# Allegro board WR5045D_Ver2.1.brd
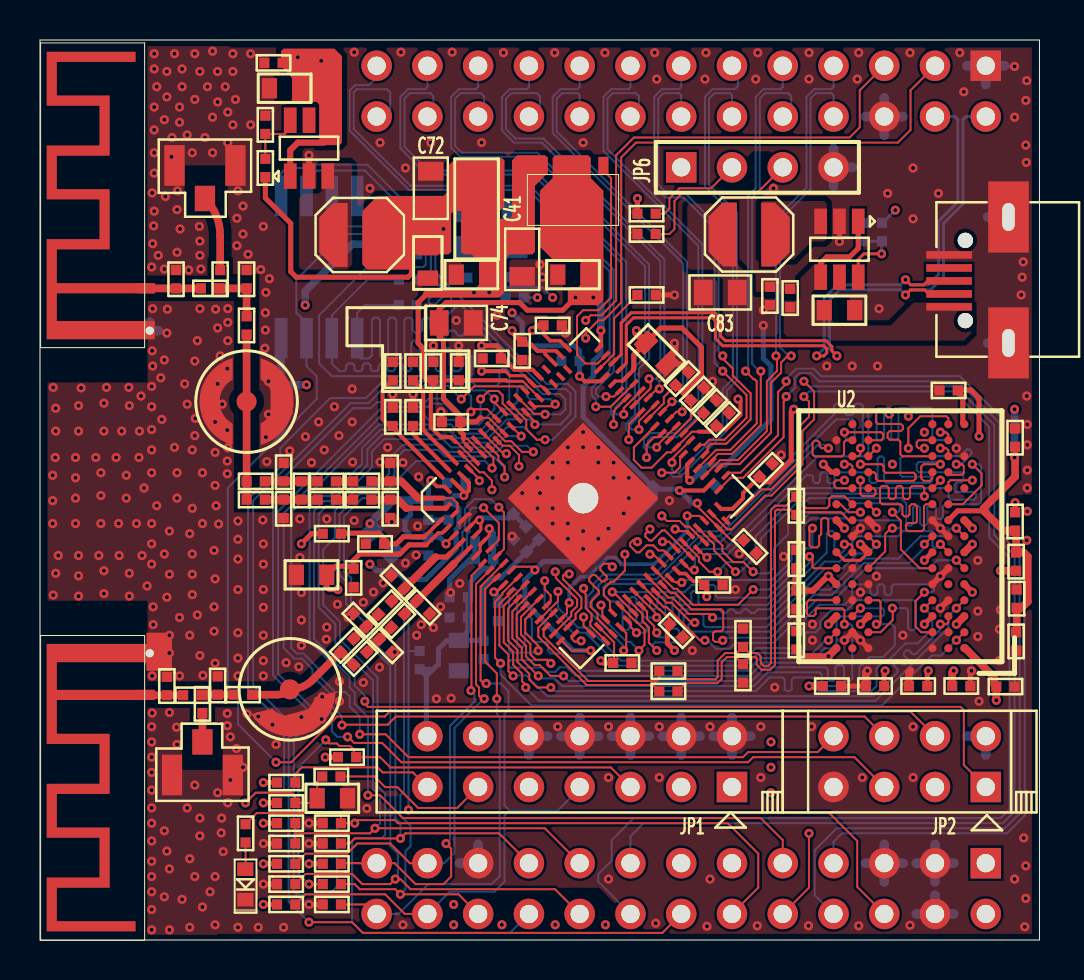
[diagram p0: board, top side]
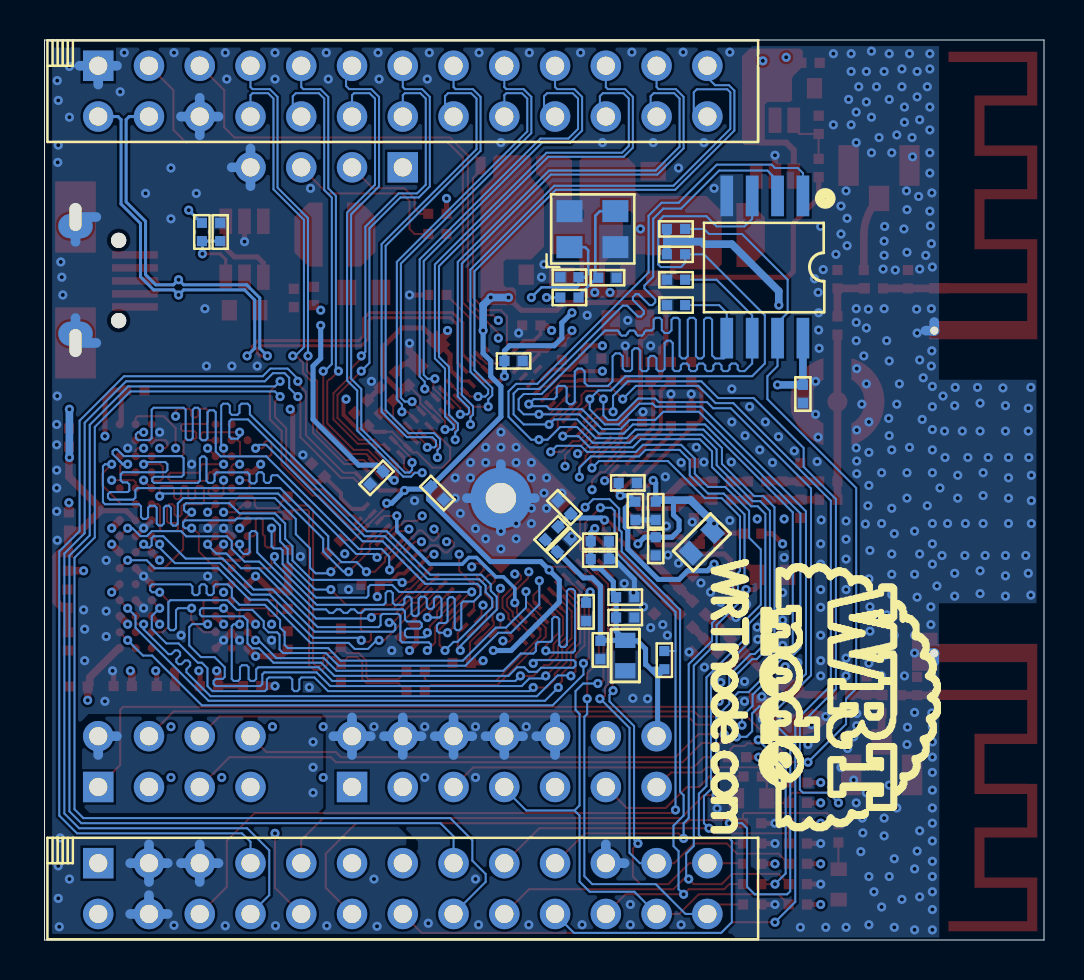
[diagram p1: board, bottom side, seen from below]

Outline 50.01 x 45.01 mm; copper layers: TOP, GND02, POWER03, BOTTOM. Coordinates in mm from the lower left corner of the outline.
Outline path: 0,45.01 0,0 50.01,0 50.01,45.01 0,45.01

## Design rules (mm)
net group DIFFPAIR2: nets RXIN0 RXIP0
net group DIFFPAIR3: nets TXON0 TXOP0
net group DIFFPAIR4: nets RXIN4 RXIP4
net group DIFFPAIR5: nets TXON4 TXOP4
net group DIFFPAIR6: nets USB_DN USB_DP
net group DIFFPAIR7: nets RXIN1 RXIP1
net group DIFFPAIR8: nets TXON1 TXOP1
net group DIFFPAIR9: nets RXIN2 RXIP2
net group DIFFPAIR10: nets TXON2 TXOP2
net group DIFFPAIR11: nets RXIN3 RXIP3
net group DIFFPAIR12: nets TXON3 TXOP3
net group DIFFPAIR13: nets MCLK_N MCLK_P
net group DIFFPAIR14: nets NETR30_2 NETR31_2
net group DDR_A: nets MA00 MA01 MA02 MA03 MA04 MA05 MA06 MA07 MA08 MA09 MA10 MA11 MA12 MBA0 MBA1 MCASN MCKE MCSN MODT MRASN MWEN
net group DDRDQ0: nets MDQ00 MDQ01 MDQ02 MDQ03 MDQ04 MDQ05 MDQ06 MDQ07 MDQM0 MDQS0
net group DDRDQ1: nets MDQ08 MDQ09 MDQ10 MDQ11 MDQ12 MDQ13 MDQ14 MDQ15 MDQM1 MDQS1
net group SPI: nets SPI_CLK SPI_CS0 SPI_MISO SPI_MOSI SPI_WP

## Placement (name value [footprint] x y rotation side)
C1  VAL*  [R0603]  17.12 19.89 45 bottom
C2  -  [R0402]  19.43 19.68 0 bottom
C3  -  [R0402]  19.43 21.46 180 bottom
C4  -  [R0402]  16.76 19.81 270 top
C5  -  [R0402]  17.65 28.45 180 top
C6  -  [R0402]  17.53 21.56 0 top
C7  -  [R0402]  12.19 21.56 180 top
C8  -  [R0402]  20.45 21.46 180 bottom
C9  -  [R0402]  14.35 22.02 90 top
C10  -  [R0402]  10.34 30.73 180 top
C11  -  [R0402]  13.08 22.48 180 top
C12  -  [R0402]  10.34 33.05 180 top
C13  -  [R0402]  6.81 33.05 180 top
C14  -  [R0402]  14.35 22.94 90 top
C15  -  [R0402]  17.53 23.39 0 top
C16  -  [R0402]  18.67 26.16 180 top
C17  -  [R0402]  12.19 23.39 180 top
C18  -  [R0402]  15.7 18.11 180 top
C19  VAL*  [R0603]  13.59 18.26 90 top
C20  -  [R0402]  20.83 22.86 270 bottom
C21  -  [R0402]  18.67 28.45 180 top
C22  -  [R0402]  17.91 17.91 225 top
C23  -  [R0402]  16 16 45 top
C25  -  [R0402]  10.16 12.27 270 top
C27  -  [R0402]  8.89 12.73 180 top
C28  -  [R0402]  6.35 12.7 180 top
C30  -  [R0402]  19.18 16.64 225 top
C31  -  [R0402]  24 21.64 315 bottom
C32  -  [R0402]  17.3 14.71 45 top
C33  -  [R0402]  23.75 33.15 90 bottom
C34  -  [R0402]  21.84 33.12 270 bottom
C35  -  [R0402]  22.23 19.94 270 bottom
C36  VAL*  [R0603]  20.95 14.22 0 bottom
C37  -  [R0402]  22.23 19.05 270 bottom
C38  -  [R0402]  20.95 17.14 270 bottom
C39  -  [R0402]  20.95 16.13 270 bottom
C40  -  [R0402]  19.68 28.45 0 top
C41  -  [R0805]  24.13 34.04 270 top
C42  -  [R0402]  43.94 12.7 90 top
C43  -  [R0402]  46.1 12.7 270 top
C44  -  [R0402]  41.78 12.7 90 top
C45  -  [R0402]  32.89 27.3 135 top
C46  -  [R0402]  48.87 17.07 0 top
C47  -  [R0402]  48.84 18.92 0 top
C48  -  [R0402]  20.95 28.45 180 top
C49  -  [R0402]  39.62 12.7 270 top
C50  -  [R0402]  37.85 19.05 0 top
C51  -  [R0402]  37.85 17.02 180 top
C52  -  [R0402]  37.85 14.99 0 top
C53  -  [R0402]  33.69 17.76 270 top
C54  -  [R0402]  29.14 13.86 270 top
C55  -  [R0402]  22.91 16.41 0 bottom
C56  -  [R0402]  48.31 12.67 270 top
C57  VAL*  [R0603]  26.67 33.27 270 top
C59  -  [R0402]  48.79 25.12 0 top
C63  VAL*  [R0603]  14.63 7.09 90 top
C64  -  [R0402]  12.06 27.3 180 bottom
C65  -  [R0402]  34.16 26.04 135 top
C66  -  [R0402]  31.83 15.47 45 top
C67  -  [R0402]  32.13 28.07 135 top
C68  VAL*  [R0603]  12.24 42.6 90 top
C69  -  [R0402]  11.68 43.87 270 top
C70  -  [R0402]  24.13 29.46 0 top
C72  -  [R0805]  19.56 37.59 90 top
C73  VAL*  [R0603]  19.41 33.86 0 top
C74  -  [R0805]  20.83 30.86 0 top
C75  -  [R0402]  20.57 25.91 90 top
C76  -  [R0402]  26.54 28.96 90 bottom
C78  -  [R0402]  36.32 23.5 135 top
C80  VAL*  [R0603]  30.86 29.34 225 top
C81  -  [R0402]  35.53 19.67 45 top
C82  -  [R0402]  30.35 22.35 135 bottom
C83  -  [R0805]  34.04 32.38 180 top
C84  -  [R0402]  36.53 32.21 180 top
C85  -  [R0402]  22.61 29.08 270 top
C86  -  [R0402]  22.2 14.5 180 bottom
C87  -  [R0402]  24.03 19.74 45 bottom
C88  -  [R0402]  33.4 23.11 225 bottom
C89  -  [R0402]  25.65 30.73 90 top
C90  VAL*  [R0603]  40.01 31.5 270 top
C91  -  [R0402]  37.54 32.11 180 top
C92  VAL*  [R0603]  21.59 33.27 90 top
C94  -  [R0402]  45.47 27.48 270 top
C95  -  [R0402]  35.18 13.34 180 top
C96  -  [R0402]  35.18 15.11 0 top
D1  LED  [D0603]  10.27 2.78 270 top
E1  Val*  [WLAN-TI-ANT-A]  3.45 37.24 90 top
E2  Val*  [WLAN-TI-ANT-B]  3.45 7.61 90 top
E3  Value*  [SMA_ANT_2]  8.26 37.08 270 top
E4  Value*  [SMA_ANT_2]  8.13 9.91 90 top
JP1  -  [IDC2X7_2_54_M]  27.01 8.92 90 top
JP2  -  [IDC2X4_2_54_M]  43.52 8.92 90 top
JP3  Val*  [IDC-13X2-2_54_M]  33.36 2.57 270 bottom
JP4  Val*  [IDC-13X2-2_54_M]  33.36 42.45 270 bottom
JP5  Value  [MICRO_USB_HOLE]  45.49 31.66 270 top
JP6  -  [SIP4]  32.09 38.64 90 top
L1  -  [R0402]  14.61 20.32 270 top
L2  -  [R0402]  16.13 22.02 270 top
L3  -  [R0402]  10.79 22.02 270 top
L4  -  [R0402]  8.51 32.59 270 top
L5  -  [R0402]  16.13 22.94 270 top
L6  -  [R0402]  10.79 22.94 270 top
L7  -  [R0402]  17.27 16.61 315 top
L8  -  [R0402]  15.37 14.73 315 top
L9  -  [R0402]  7.62 12.24 270 top
L10  -  [R0402]  17.91 15.97 315 top
L11  -  [R0402]  16.03 14.07 315 top
L12  -  [R0402]  24.64 20.35 225 bottom
L13  Value*  [L_3X3]  16 35.26 0 top
L14  Value*  [L_3X3]  35.48 35.28 180 top
NOREF  -  []  11.48 13.84 270 bottom
R1  -  [R0402]  17.65 26.16 0 top
R2  -  [R0402]  23.75 32.13 270 bottom
R3  -  [R0402]  37.85 21.72 180 top
R4  -  [R0402]  48.79 20.93 180 top
R5  -  [R0402]  48.84 14.94 180 top
R6  -  [R0402]  30.35 35.31 90 top
R7  -  [R0402]  14.61 1.78 90 top
R8  -  [R0402]  30.35 32.26 270 top
R9  -  [R0402]  12.32 3.81 90 top
R10  -  [R0402]  12.32 6.86 90 top
R11  -  [R0402]  15.37 9.14 90 top
R12  -  [R0402]  12.32 1.78 90 top
R13  -  [R0402]  18.41 35.56 90 bottom
R14  -  [R0402]  33.53 26.67 135 top
R15  -  [R0402]  11.28 38.61 180 top
R16  VAL*  [R1206]  21.84 36.58 0 top
R17  -  [R0402]  11.28 40.77 180 top
R18  -  [R0402]  14.61 3.81 90 top
R19  -  [R0402]  14.61 2.79 270 top
R20  -  [R0402]  41.22 35.41 0 bottom
R21  -  [R0402]  42.14 35.41 180 bottom
R22  -  [R0402]  19 14 180 bottom
R23  -  [R0402]  12.32 2.79 270 top
R24  -  [R0402]  14.61 4.83 270 top
R25  -  [R0402]  18.41 34.29 270 bottom
R26  -  [R0402]  14.61 5.84 270 top
R27  -  [R0402]  18.41 31.75 270 bottom
R28  -  [R0402]  18.41 33.02 270 bottom
R29  -  [R0402]  30.35 36.32 270 top
R30  -  [R0402]  31.45 13.45 270 top
R31  -  [R0402]  31.45 12.43 270 top
R32  -  [R0402]  12.32 4.83 270 top
R33  -  [R0402]  14.58 8.18 90 top
R34  -  [R0402]  12.32 7.87 90 top
R35  -  [R0402]  9.02 33.05 180 top
R36  -  [R0402]  8.13 11.81 0 top
R37  -  [R0402]  12.32 5.84 270 top
R38  -  [R0402]  10.29 5.33 180 top
T1  -  [T_3_5]  10.34 26.92 270 top
T2  -  [T_3_5]  12.51 12.54 195 top
U1  Value*  [QFN-148-RT]  27.18 22.1 45 top
U2  -  [FPBGA-84N]  43.05 20.19 180 top
U3  VAL*  [SO-8W]  13.97 33.66 90 bottom
U4  -  [SOT23-6L]  13.46 39.6 90 top
U5  -  [SOT23-6L]  40.01 34.54 270 top
U6  Value*  [SOT-89]  26.67 36.2 180 top
Y1  VAL*  [SMD3225B]  23.75 36.45 180 bottom

## Library data of the parts
C1 C19 C36 C57 C63 C68 C73 C80 C90 C92 = R0603
C2-C18 C20-C23 C25 C27 C28 C30-C35 C37-C40 C42-C56 C59 C64-C67 C69 C70 C75 C76 C78 C81 C82 C84-C89 C91 C94-C96 L1-L12 R1-R15 R17-R38 = R0402
C41 C72 C74 C83 = R0805
D1 = D0603
E1 = WLAN-TI-ANT-A
E2 = WLAN-TI-ANT-B
E3 E4 = SMA_ANT_2
JP1 = IDC2X7_2_54_M
JP2 = IDC2X4_2_54_M
JP3 JP4 = IDC-13X2-2_54_M
JP5 = MICRO_USB_HOLE
JP6 = SIP4
L13 L14 = L_3X3
R16 = R1206
T1 T2 = T_3_5
U1 = QFN-148-RT
U2 = FPBGA-84N
U3 = SO-8W
U4 U5 = SOT23-6L
U6 = SOT-89
Y1 = SMD3225B

## Footprints (pads in the part's own frame, mm; a bottom-side part is the same pattern mirrored in y, then rotated)
D0603
  rect 0.686x0.813 smd: 1(-0.762,0) 2(0.762,0)
FPBGA-84N
  round 0.406 smd: A1(-3.2,5.601) A2(-2.4,5.601) A3(-1.6,5.601) A7(1.6,5.601) A8(2.4,5.601) A9(3.2,5.601) B1(-3.2,4.801) B2(-2.4,4.801) B3(-1.6,4.801) B7(1.6,4.801) B8(2.4,4.801) B9(3.2,4.801) C1(-3.2,4) C2(-2.4,4) C3(-1.6,4) C7(1.6,4) C8(2.4,4) C9(3.2,4) D1(-3.2,3.2) D2(-2.4,3.2) D3(-1.6,3.2) D7(1.6,3.2) D8(2.4,3.2) D9(3.2,3.2) E1(-3.2,2.4) E2(-2.4,2.4) E3(-1.6,2.4) E7(1.6,2.4) E8(2.4,2.4) E9(3.2,2.4) F1(-3.2,1.6) F2(-2.4,1.6) F3(-1.6,1.6) F7(1.6,1.6) F8(2.4,1.6) F9(3.2,1.6) G1(-3.2,0.8) G2(-2.4,0.8) G3(-1.6,0.8) G7(1.6,0.8) G8(2.4,0.8) G9(3.2,0.8) H1(-3.2,0) H2(-2.4,0) H3(-1.6,0) H7(1.6,0) H8(2.4,0) H9(3.2,0) J1(-3.2,-0.8) J2(-2.4,-0.8) J3(-1.6,-0.8) J7(1.6,-0.8) J8(2.4,-0.8) J9(3.2,-0.8) K2(-2.4,-1.6) K3(-1.6,-1.6) K7(1.6,-1.6) K8(2.4,-1.6) K9(3.2,-1.6) L1(-3.2,-2.4) L2(-2.4,-2.4) L3(-1.6,-2.4) L7(1.6,-2.4) L8(2.4,-2.4) M2(-2.4,-3.2) M3(-1.6,-3.2) M7(1.6,-3.2) M8(2.4,-3.2) M9(3.2,-3.2) N1(-3.2,-4) N2(-2.4,-4) N3(-1.6,-4) N7(1.6,-4) N8(2.4,-4) P2(-2.4,-4.801) P3(-1.6,-4.801) P7(1.6,-4.801) P8(2.4,-4.801) P9(3.2,-4.801) R1(-3.2,-5.601) R2(-2.4,-5.601) R3(-1.6,-5.601) R7(1.6,-5.601) R8(2.4,-5.601)
IDC2X4_2_54_M
  rect 1.524x1.524 hole 0.914: 1(-1.27,-3.81)
  round 1.524 hole 0.914: 2(1.27,-3.81) 3(-1.27,-1.27) 4(1.27,-1.27) 5(-1.27,1.27) 6(1.27,1.27) 7(-1.27,3.81) 8(1.27,3.81)
IDC2X7_2_54_M
  rect 1.524x1.524 hole 0.914: 1(-1.27,-7.62)
  round 1.524 hole 0.914: 2(1.27,-7.62) 3(-1.27,-5.08) 4(1.27,-5.08) 5(-1.27,-2.54) 6(1.27,-2.54) 7(-1.27,0) 8(1.27,0) 9(-1.27,2.54) 10(1.27,2.54) 11(-1.27,5.08) 12(1.27,5.08) 13(-1.27,7.62) 14(1.27,7.62)
IDC-13X2-2_54_M
  rect 1.524x1.524 hole 0.914: 1(-1.27,-13.97)
  round 1.524 hole 0.914: 2(1.27,-13.97) 3(-1.27,-11.43) 4(1.27,-11.43) 5(-1.27,-8.89) 6(1.27,-8.89) 7(-1.27,-6.35) 8(1.27,-6.35) 9(-1.27,-3.81) 10(1.27,-3.81) 11(-1.27,-1.27) 12(1.27,-1.27) 13(-1.27,1.27) 14(1.27,1.27) 15(-1.27,3.81) 16(1.27,3.81) 17(-1.27,6.35) 18(1.27,6.35) 19(-1.27,8.89) 20(1.27,8.89) 21(-1.27,11.43) 22(1.27,11.43) 23(-1.27,13.97) 24(1.27,13.97) 25(-1.27,16.51) 26(1.27,16.51)
L_3X3
  custom 1.422x3.2 smd: 1(-1.321,0) 2(1.321,0)
MICRO_USB_HOLE
  round 0.762 hole 0.762 unplated: (-3.327,0.813) (0.686,0.813)
  rect 0.381x2.286 smd: 1(0,0) 2(-0.65,0) 3(-1.3,0) 4(-1.95,0) 5(-2.6,0)
  rect 3.556x2.032 hole 1.397x0.61: 8(-4.496,2.972) 9(1.803,2.972)
QFN-148-RT
  rect 0.513x0.194 smd: 1(-5.8,4.25) 2(-5.8,3.75) 3(-5.8,3.25) 4(-5.8,2.75) 5(-5.8,2.25) 6(-5.8,1.75) 7(-5.8,1.25) 8(-5.8,0.75) 9(-5.8,0.25) 10(-5.8,-0.25) 11(-5.8,-0.75) 12(-5.8,-1.25) 13(-5.8,-1.75) 14(-5.8,-2.25) 15(-5.8,-2.75) 16(-5.8,-3.25) 17(-5.8,-3.75) 18(-5.8,-4.25) 37(5.8,-4.25) 38(5.8,-3.75) 39(5.8,-3.25) 40(5.8,-2.75) 41(5.8,-2.25) 42(5.8,-1.75) 43(5.8,-1.25) 44(5.8,-0.75) 45(5.8,-0.25) 46(5.8,0.25) 47(5.8,0.75) 48(5.8,1.25) 49(5.8,1.75) 50(5.8,2.25) 51(5.8,2.75) 52(5.8,3.25) 53(5.8,3.75) 54(5.8,4.25) 55(5.8,4.75) 75(-5.15,4.5) 76(-5.15,4) 77(-5.15,3.5) 78(-5.15,3) 79(-5.15,2.5) 80(-5.15,2) 81(-5.15,1.5) 82(-5.15,1) 83(-5.15,0.5) 84(-5.15,0) 85(-5.15,-0.5) 86(-5.15,-1) 87(-5.15,-1.5) 88(-5.15,-2) 89(-5.15,-2.5) 90(-5.15,-3) 91(-5.15,-3.5) 92(-5.15,-4) 93(-5.15,-4.5) 113(5.15,-4.5) 114(5.15,-4) 115(5.15,-3.5) 116(5.15,-3) 117(5.15,-2.5) 118(5.15,-2) 119(5.15,-1.5) 120(5.15,-1) 121(5.15,-0.5) 122(5.15,0) 123(5.15,0.5) 124(5.15,1) 125(5.15,1.5) 126(5.15,2) 127(5.15,2.5) 128(5.15,3) 129(5.15,3.5) 130(5.15,4)
  rect 0.194x0.513 smd: 19(-4.25,-5.8) 20(-3.75,-5.8) 21(-3.25,-5.8) 22(-2.75,-5.8) 23(-2.25,-5.8) 24(-1.75,-5.8) 25(-1.25,-5.8) 26(-0.75,-5.8) 27(-0.25,-5.8) 28(0.25,-5.8) 29(0.75,-5.8) 30(1.25,-5.8) 31(1.75,-5.8) 32(2.25,-5.8) 33(2.75,-5.8) 34(3.25,-5.8) 35(3.75,-5.8) 36(4.25,-5.8) 56(4.75,5.8) 57(4.25,5.8) 58(3.75,5.8) 59(3.25,5.8) 60(2.75,5.8) 61(2.25,5.8) 62(1.75,5.8) 63(1.25,5.8) 64(0.75,5.8) 65(0.25,5.8) 66(-0.25,5.8) 67(-0.75,5.8) 68(-1.25,5.8) 69(-1.75,5.8) 70(-2.25,5.8) 71(-2.75,5.8) 72(-3.25,5.8) 73(-3.75,5.8) 74(-4.25,5.8) 94(-4.5,-5.15) 95(-4,-5.15) 96(-3.5,-5.15) 97(-3,-5.15) 98(-2.5,-5.15) 99(-2,-5.15) 100(-1.5,-5.15) 101(-1,-5.15) 102(-0.5,-5.15) 103(0,-5.15) 104(0.5,-5.15) 105(1,-5.15) 106(1.5,-5.15) 107(2,-5.15) 108(2.5,-5.15) 109(3,-5.15) 110(3.5,-5.15) 111(4,-5.15) 112(4.5,-5.15) 131(4,5.15) 132(3.5,5.15) 133(3,5.15) 134(2.5,5.15) 135(2,5.15) 136(1.5,5.15) 137(1,5.15) 138(0.5,5.15) 139(0,5.15) 140(-0.5,5.15) 141(-1,5.15) 142(-1.5,5.15) 143(-2,5.15) 144(-2.5,5.15) 145(-3,5.15) 146(-3.5,5.15) 147(-4,5.15) 148(-4.5,5.15)
  rect 5.334x5.334 hole 1.524: 149(0,0)
R0402
  rect 0.508x0.508 smd: 1(0,0.457) 2(0,-0.457)
R0603
  rect 1.016x0.762 smd: 1(0,0.76) 2(0,-0.76)
R0805
  rect 0.94x1.27 smd: 1(-0.851,0) 2(0.851,0)
R1206
  rect 1.524x1.6 smd: 1(0,1.397) 2(0,-1.397)
SIP4
  rect 1.524x1.524 hole 0.914: 1(0,0)
  round 1.524 hole 0.914: 2(0,-2.54) 3(0,-5.08) 4(0,-7.62)
SMA_ANT_2
  rect 1.27x1.016 smd: 1(0,0)
  rect 2.032x1.016 smd: 2(-1.651,-1.524) 3(-1.651,1.524)
SMD3225B
  rect 1.3x1.1 smd: 1(0,-1.8) 2(2.3,-1.8) 3(2.3,0) 4(0,0)
SO-8W
  rect 2.032x0.635 smd: 1(3.556,-1.905) 2(3.556,-0.635) 3(3.556,0.635) 4(3.556,1.905) 5(-3.556,1.905) 6(-3.556,0.635) 7(-3.556,-0.635) 8(-3.556,-1.905)
SOT23-6L
  rect 1.27x0.635 smd: 1(-1.397,0.94) 2(-1.397,0) 3(-1.397,-0.94) 4(1.397,-0.94) 5(1.397,0) 6(1.397,0.94)
SOT-89
  rect 0.508x0.889 smd: 1(-1.524,-2.527) 2(0,-2.527) 3(1.524,-2.527)
  oval 1.778x3.81 smd: 4(0,0)
T_3_5
  round 1 smd: 1(0,0)
  rect 1.3x1.1 smd: 2(0,1.75)
WLAN-TI-ANT-A
  rect 0.508x0.889 smd: 1(-4.648,-1.854)
  round 0.508 hole 0.406: 2(-6.769,-2.045)
WLAN-TI-ANT-B
  rect 0.508x0.889 smd: 1(4.648,-1.854)
  round 0.508 hole 0.406: 2(6.731,-2.045)

## Nets
3.3VD: C8.1 C18.2 C19.2 C20.2 C35.2 C36.2 C37.2 C38.2 C39.2 C64.1 C65.1 C68.2 C69.1 C70.1 C76.1 C78.1 C83.1 C84.1 C85.1 C86.1 C87.1 C88.1 C89.1 JP1.14 JP2.2 JP3.1 JP3.2 JP6.1 L1.2 L12.2 L14.2 R9.1 R10.1 R11.1 R12.1 R13.1 R18.1 R21.1 R22.2 R25.2 R29.2 R34.1 R37.2 U1.2 U1.6 U1.56 U1.57 U1.58 U1.60 U1.61 U1.80 U1.112 U1.117 U1.119 U1.122 U1.129 U1.134 U1.146 U1.147 U3.8 U4.1 U4.4
5.0VD: C90.2 C91.1 JP5.1 U5.1 U5.4
GND: C1.1 C2.1 C3.2 C4.2 C5.2 C6.2 C7.1 C8.2 C12.2 C13.2 C15.1 C16.2 C17.2 C18.1 C19.1 C20.1 C21.2 C22.2 C23.1 C27.2 C28.2 C30.1 C31.2 C32.2 C33.1 C34.1 C35.1 C36.1 C37.1 C38.1 C39.1 C40.1 C41.2 C42.1 C43.1 C44.1 C45.2 C46.1 C48.2 C49.1 C50.1 C51.1 C52.1 C53.1 C54.1 C55.1 C56.1 C57.2 C59.1 C63.2 C64.2 C65.2 C66.2 C67.2 C68.1 C69.2 C70.2 C72.2 C73.2 C74.2 C75.1 C76.2 C78.2 C80.1 C81.2 C82.2 C83.2 C84.2 C85.2 C86.2 C87.2 C88.2 C89.2 C90.1 C91.2 C92.1 C94.2 C95.1 C96.1 D1.2 E1.2 E2.2 E3.2 E3.3 E4.2 E4.3 JP1.2 JP1.4 JP1.6 JP1.8 JP1.10 JP2.7 JP3.3 JP3.4 JP3.5 JP3.21 JP4.1 JP4.6 JP5.5 JP5.8 JP5.9 JP6.4 R1.1 R5.1 R6.1 R7.1 R8.1 R14.2 R17.2 R20.2 R23.2 R24.2 R26.2 R27.2 R28.2 R32.2 T1.2 T2.2 U1.77 U1.149 U2.A3 U2.A7 U2.B2 U2.B8 U2.D2 U2.D8 U2.E3 U2.E7 U2.F2 U2.F8 U2.H2 U2.H8 U2.J3 U2.J7 U2.N1 U2.P9 U3.4 U4.2 U5.2 Y1.2 Y1.4
ANT_TRN: JP3.18 R23.1 U1.142
ANT_TRNB: JP3.19 R24.1 U1.69
DDR_REF: C46.2 C47.1 C59.2 R4.1 R5.2 U1.91 U1.110 U2.J2
DDR_VDD: C42.2 C43.2 C44.2 C47.2 C49.2 C50.2 C51.2 C52.2 C53.2 C54.2 C55.2 C56.2 C72.1 C73.1 C94.1 L13.2 R4.2 R15.1 R16.1 U1.10 U1.29 U1.93 U1.95 U2.A1 U2.A9 U2.C1 U2.C3 U2.C7 U2.C9 U2.E1 U2.E9 U2.G1 U2.G3 U2.G7 U2.G9 U2.J1 U2.J9 U2.M9 U2.R1
DINT: JP1.13 R34.2
EXT_LDO_DIG: U1.54 U6.1
GPO0: JP3.17 R32.1 R37.1 U1.139
HD: JP2.4 R13.2 U3.7
I2C_SCLK: JP3.15 U1.111
I2C_SD: JP3.16 U1.36
JDO: JP1.5 R11.2 R19.2
LINK0: JP3.22 R19.1 U1.82
LINK1: JP1.3 JP3.23 R9.2 U1.8
LINK2: JP1.7 JP3.24 R12.2 U1.83
LINK3: JP1.9 JP3.25 R18.2 U1.7
LINK4: JP1.1 JP3.26 R7.2 U1.9
MA00: U1.20 U2.M8
MA01: U1.107 U2.M3
MA02: U1.96 U2.M7
MA03: U1.31 U2.N2
MA04: U1.21 U2.N8
MA05: U1.106 U2.N3
MA06: U1.97 U2.N7
MA07: U1.30 U2.P2
MA08: U1.22 U2.P8
MA09: U1.104 U2.P3
MA10: U1.32 U2.M2
MA11: U1.98 U2.P7
MA12: U1.105 U2.R2
MBA0: U1.33 U2.L2
MBA1: U1.108 U2.L3
MCASN: U1.19 U2.L7
MCKE: U1.34 U2.K2
MCLK_N: C96.2 R3.2 R30.1 U2.K8
MCLK_P: C95.2 R3.1 R31.1 U2.J8
MCSN: U1.94 U2.L8
MDQ00: U1.24 U2.G8
MDQ01: U1.26 U2.G2
MDQ02: U1.99 U2.H7
MDQ03: U1.27 U2.H3
MDQ04: U1.102 U2.H1
MDQ05: U1.23 U2.H9
MDQ06: U1.101 U2.F1
MDQ07: U1.100 U2.F9
MDQ08: U1.88 U2.C8
MDQ09: U1.11 U2.C2
MDQ10: U1.87 U2.D7
MDQ11: U1.12 U2.D3
MDQ12: U1.86 U2.D1
MDQ13: U1.13 U2.D9
MDQ14: U1.85 U2.B1
MDQ15: U1.14 U2.B9
MDQM0: U1.28 U2.F3
MDQM1: U1.15 U2.B3
MDQS0: U1.103 U2.F7
MDQS1: U1.89 U2.B7
MODT: U1.17 U2.K9
MRASN: U1.92 U2.K7
MWEN: U1.109 U2.K3
NETC4_1: C4.1 L1.1 U1.1
NETC5_1: C5.1 R1.2 U1.74
NETC6_1: C6.1 L2.1 U1.75
NETC7_2: C7.2 C9.1 C11.1 L3.1
NETC9_2: C9.2 L2.2
NETC10_1: C10.1 L3.2 L6.2 T1.1
NETC10_2: C10.2 C12.1 L4.1 R35.1
NETC11_2: C11.2 C14.1 C17.1 L6.1
NETC13_1: C13.1 E1.1 L4.2
NETC14_2: C14.2 L5.2
NETC15_2: C15.2 L5.1 U1.76
NETC22_1: C22.1 L7.1 U1.4
NETC23_2: C23.2 L7.2 L8.1
NETC25_1: C25.1 L8.2 L11.2 T2.1
NETC25_2: C25.2 C27.1 L9.1 R36.1
NETC26_2: C32.1 L10.2 L11.1
NETC28_1: C28.1 E2.1 L9.2
NETC30_2: C30.2 L10.1 U1.5
NETC31_1: C31.1 L12.1 U1.78 U1.79
NETC33_2: C33.2 U1.145 Y1.1
NETC34_2: C34.2 R2.1 Y1.3
NETD1_2: D1.1 R38.1
NETE3_1: E3.1 R35.2
NETE4_1: E4.1 R36.2
NETJP1_11: JP1.11 R33.2
NETL13_1: L13.1 U4.3
NETL14_1: L14.1 U5.3
NETR2_2: R2.2 U1.71
NETR8_2: R8.2 U1.130
NETR14_1: R14.1 U1.43
NETR15_2: R15.2 R17.1 U4.6
NETR20_1: R20.1 R21.2 U5.6
NETR30_2: R30.2 U1.16
NETR31_2: R31.2 U1.90
PA_PE_G0: JP4.3 U1.141
PA_PE_G1: JP4.5 U1.68
PLL_VC_CAP: C16.1 U1.73
RSTN: C63.1 R10.2 R33.1 U1.66
RXD2: JP3.7 JP6.3 R6.2 U1.37
RXIN0: JP4.7 U1.115
RXIN1: JP4.11 U1.42
RXIN2: JP4.15 U1.121
RXIN3: JP4.19 U1.125
RXIN4: JP4.23 U1.126
RXIP0: JP4.8 U1.38
RXIP1: JP4.12 U1.118
RXIP2: JP4.16 U1.44
RXIP3: JP4.20 U1.48
RXIP4: JP4.24 U1.49
SOC_1.2VD: C45.1 C48.1 C57.1 C66.1 C67.1 C74.1 C75.2 C80.2 C81.1 C82.1 U1.18 U1.25 U1.35 U1.51 U1.55 U1.70 U1.84 U1.114 U1.120 U1.123 U1.128 U1.135 U1.140 U1.143 U6.2 U6.4
SOC_1.5VD: C1.2 C2.2 C3.1 C40.2 C41.1 C92.2 R16.2 U1.3 U1.144 U1.148 U6.3
SPI_CLK: JP2.6 JP3.13 R28.1 U1.136 U3.6
SPI_CS0: JP2.1 U1.64 U3.1
SPI_CS1: JP3.14 U1.62
SPI_HOLD: JP3.12 R26.1 R38.2 U1.138
SPI_MISO: JP2.3 JP3.9 U1.137 U3.2
SPI_MOSI: JP2.8 JP3.10 R27.1 U1.63 U3.5
SPI_WP: JP2.5 JP3.11 R25.1 U1.65 U3.3
TXD2: JP3.8 JP6.2 R29.1 U1.113
TXON0: JP4.9 U1.116
TXON1: JP4.13 U1.41
TXON2: JP4.17 U1.46
TXON3: JP4.21 U1.124
TXON4: JP4.26 U1.127
TXOP0: JP4.10 U1.39
TXOP1: JP4.14 U1.40
TXOP2: JP4.18 U1.45
TXOP3: JP4.22 U1.47
TXOP4: JP4.25 U1.50
USB_DN: JP4.2 JP5.2 U1.53
USB_DP: JP4.4 JP5.3 U1.52
WDT_RST_N: JP3.20 U1.67
WLED_N: JP3.6 R22.1 U1.81
XTAL_V12A: C21.1 U1.72

Pads without a net: JP1 12; JP5 4; U1 59 131 132 133; U2 A2 A8 E2 E8 L1 R3 R7 R8; U4 5; U5 5

## Via types
v1: diameter 0.457, hole 0.203, TOP to BOTTOM, 700 vias

## Routing (per net, layer and track width the routed paths; a pad name or vN(x,y) marks a point on that pad's centre or on a via; arc(x,y) is an arc through that point)
3.3VD: length 136.3
  TOP w0.102: 32.95,25.42 32.62,25.42 U1.119 31.59,24.38 31.37,24.38 30.61,23.62 30.1,23.62 29.72,24 29.72,24.64 U1.122 ; U1.61 24.77,27.69 25.13,27.69 U1.134
  TOP w0.152: U1.6 21.84,19.25 22.02,19.43 22.02,19.77 U1.80 22.48,20.23 v1(22.48,20.57) ; 23.29,28.45 23.52,28.22 24.24,28.22 U1.61
  TOP w0.178: 20.42,20.65 20.14,20.36 19.93,20.36 19.33,19.76 ; U1.56 26.02,29.97 25.53,29.97 25.2,30.3 C89.1 ; 25.73,28.85 25.27,29.31 25.27,29.46 25.82,29.46 U1.57
  TOP w0.203: U1.60 24.64,28.52 23.72,28.52 23.16,29.08 C85.1 ; C78.1 35.18,22.35 35.18,22.09 34.65,21.56 34.08,21.56 U1.112 ; v1(34.92,27.05) 35.05,26.92 35.05,26.26 34.33,25.54 34.02,25.54 33.85,25.71 C65.1 33.55,25.42 32.95,25.42 ; U1.146 21.46,22.86 21.46,22.48 v1(21.21,22.23) 21.21,22.41 U1.147 ; v1(32.51,22.99) 32.38,23.11 32.38,23.77 U1.117 ; C70.1 24.27,29.78 24.57,29.78 24.89,29.46 25.27,29.46 ; U1.129 28.07,27.94 27.25,27.94 v1(27,28.19) ; v1(22.1,28.45) 23.29,28.45
  TOP w0.254: C78.1 36.01,23.17 36.27,22.91 36.5,22.91 37.59,24 37.59,26.42 v1(37.72,26.54) ; C89.1 24.89,30.73 v1(24.64,30.48) ; v1(23.62,30.48) 23.62,30.4 24.13,29.9 C70.1 ; 19.33,19.76 18.47,19.76 18.01,19.3 16,19.3 15.7,19 C18.2 15.57,18.69 14.81,18.69 14.38,18.26 C19.2 14.35,18.26 14.35,17.65 14.48,17.53 v1(14.91,17.53) ; R29.2 v1(29.9,37.08) ; R37.2 v1(11.18,5.84) ; L1.2 13.59,20.32 v1(13.08,19.81) ; R10.1 v1(11.18,6.86) ; C85.1 23.06,29.51 22.86,29.72 v1(22.1,29.72) ; R34.1 v1(11.18,7.87) ; R9.1 v1(11.18,3.81) ; R18.1 v1(13.46,3.81) ; R12.1 v1(11.18,1.78) ; R11.1 v1(14.27,9.14)
  TOP w0.305: U4.1 12.52,39.5 12.9,39.88 14.22,39.88
  POWER03 w0.483: 19.39,9.25 JP1.14 ; JP1.14 19.39,11.13 ; JP1.14 18.45,10.19 ; JP1.14 20.33,10.19 ; 31.15,38.64 JP6.1 ; JP6.1 32.09,37.7 ; JP6.1 33.03,38.64 ; JP6.1 32.09,39.58 ; 47.33,9.25 JP2.2 ; JP2.2 47.33,11.13 ; JP2.2 48.27,10.19 ; JP2.2 46.39,10.19 ; JP3.2 47.33,2.24 ; JP3.2 48.27,1.3 ; JP3.2 46.39,1.3 ; JP3.1 48.27,3.84 ; JP3.1 47.33,2.9 ; JP3.1 46.39,3.84 ; JP3.1 47.33,4.78
  BOTTOM w0.152: v1(42.8,36.5) 42.16,35.86 R21.1
  BOTTOM w0.254: C20.2 21.29,22.3 v1(21.21,22.23) 20.75,22.23 C8.1 20.62,21.92 20.95,21.59 20.95,20.65 20.83,20.52 20.83,19.56 19.3,18.03 18.26,18.03 17.83,18.47 16.84,18.47 v1(16.51,18.8) ; C36.2 20.93,14.96 20.35,14.96 19.94,14.55 19.94,13.77 19.9,13.77 19.34,13.2 ; C36.2 22.18,14.98 C86.1 22.2,17.7 22.61,18.11 23.05,18.11 C87.1 L12.2 ; C36.2 21.41,15.44 C39.2 C38.2 21.55,17.28 21.55,17.92 22.17,18.54 22.18,18.54 22.23,18.59 22.53,18.59 22.68,18.75 C37.2 C35.2 22.68,20.37 v1(22.48,20.57) ; 19.34,13.2 19.34,10.24 JP1.14 ; 19.34,13.2 R22.2 19.53,13.54 19.34,13.34 19.34,13.36 ; v1(36.2,30.73) 36.2,29.08 36.58,28.7 36.58,26.04 34.29,23.75 33.39,23.75 C88.1 32.63,22.99 v1(32.51,22.99) ; v1(27,28.19) C76.1 27,29.46 26.75,29.72 24.51,29.72 24.13,30.1 24.13,30.86 v1(23.62,31.37)
  BOTTOM w0.381: 18.87,34.92 R13.1 ; 18.87,34.92 R25.2 ; 18.87,34.92 17.14,34.92 17.02,34.8 15.62,34.8 13.27,32.45 v1(13.27,31.75) ; v1(13.34,27.76) C64.1 12.06,30.1
  BOTTOM w0.483: 46.39,10.19 JP2.2 47.33,9.25
  vias: v1(12.9,44.15) v1(14.07,43.97) v1(36.2,31.5) v1(36.58,9.91) v1(36.58,8.64) v1(36.58,7.37)
5.0VD: length 4.2
  TOP w0.254: U5.1 40.94,34.59 40.51,34.16 39.37,34.16 39.07,33.86 U5.4
GND: length 80.5
  TOP w0.178: U1.77 21.42,21.29 21.52,21.29
  TOP w0.254: R8.1 v1(31.75,32.26) ; U2.H2 v1(45.05,20.59) U2.J3 ; U2.A7 v1(41.05,14.99) ; C45.2 R14.2 ; C75.1 20.12,26.37 v1(20.07,26.42) ; C49.1 C44.1 ; R23.2 v1(11.18,2.79) ; U5.2 v1(40.01,34.92) ; C67.2 32.05,28.8 C80.1 ; R32.2 v1(11.18,4.83) ; U2.B8 v1(40.25,14.99) ; U2.H8 v1(41.05,20.59) ; v1(46.61,13.46) 46.56,13.41 C43.1 ; R1.1 v1(17.65,27.3) ; C16.2 v1(18.67,27.3) ; R7.1 v1(13.46,1.78) ; R26.2 v1(13.46,5.84) ; C48.2 v1(20.95,29.72) ; R24.2 v1(13.46,4.83)
  TOP w0.305: U2.E3 v1(45.05,18.19) U2.F2 ; v1(41.05,14.99) U2.B8 ; U4.2 v1(13.46,39.24) ; U2.D2 v1(45.05,16.59)
  TOP w0.381: C42.1 43.48,13.39 43.56,13.46 ; v1(31.75,29.84) 31.75,29.41 31.4,29.06 C80.1 ; C44.1 41.33,13.39 v1(41.4,13.46) ; U2.J7 v1(41.85,20.59)
  BOTTOM w0.102: v1(48.77,43.69) 48.3,43.69 48.27,43.72
  BOTTOM w0.254: C38.1 20.5,18.03 21.51,19.05 C37.1 C35.1 ; C3.2 C8.2
  BOTTOM w0.483: 26.07,10.19 JP1.8 ; JP1.8 27.95,10.19 ; JP1.8 27.01,11.13 ; JP1.8 27.01,9.25 ; 21.93,4.78 JP3.21 20.99,3.84 ; JP6.4 39.71,39.58 ; JP6.4 40.65,38.64 ; JP6.4 39.71,37.7 ; JP4.6 43.19,41.18 ; JP4.6 41.31,41.18 ; JP4.6 42.25,40.24 ; JP4.6 42.25,42.12 ; 5.49,30.91 E1.2 5.93,30.47 ; 5.49,13.91 E2.2 5.93,14.34 ; 25.48,22.1 U1.149 ; U1.149 27.18,23.8 ; U1.149 28.88,22.1 ; U1.149 v1(27.18,20.45) ; JP3.4 45.73,1.3 ; JP3.4 44.79,2.24 ; JP3.4 43.85,1.3 ; 47.42,36.16 JP5.8 ; JP5.8 48.46,36.49 ; JP5.8 48.46,34.91 ; JP1.6 29.55,11.13 ; JP1.6 30.49,10.19 ; JP1.6 29.55,9.25 ; JP1.6 28.61,10.19 ; 47.33,42.78 JP4.1 ; JP4.1 48.27,43.72 ; JP4.1 46.39,43.72 ; 31.15,10.19 JP1.4 ; JP1.4 33.03,10.19 ; JP1.4 32.09,11.13 ; JP1.4 32.09,9.25 ; JP1.10 25.41,10.19 ; JP1.10 24.47,9.25 ; JP1.10 24.47,11.13 ; JP5.9 48.46,31.1 ; JP5.9 48.46,29.53 ; JP5.9 47.42,29.86 ; JP1.2 35.57,10.19 ; JP1.2 34.63,11.13 ; JP1.2 34.63,9.25 ; JP1.2 33.69,10.19 ; 43.85,3.84 JP3.3 ; JP3.3 45.73,3.84 ; JP3.3 44.79,2.9 ; JP3.3 44.79,4.78 ; JP3.5 42.25,4.78 ; JP3.5 41.31,3.84 ; JP3.5 43.19,3.84 ; JP3.5 42.25,2.9
  vias: v1(0.64,23.24) v1(0.64,21.97) v1(0.64,20.83) v1(0.66,27.64) v1(0.66,17.25) v1(0.79,26.59) v1(0.79,25.45) v1(0.76,24.13) v1(0.79,18.34) v1(0.91,19.23) v1(1.78,24.13) v1(1.78,23.11) v1(1.78,22.1) v1(1.78,20.83) v1(1.93,26.72) v1(1.93,25.45) v1(1.93,19.23) v1(1.93,18.21) v1(1.93,17.2) v1(2.06,27.61) v1(2.79,24.13) v1(2.95,19.23) v1(3.05,23.37) v1(3.05,22.23) v1(3.05,20.83) v1(3.2,26.85) v1(3.2,25.45) v1(3.2,18.47) v1(3.2,17.32) v1(3.33,27.64) v1(3.81,24.13) v1(3.94,20.83) v1(3.96,19.23) v1(4.09,25.45) v1(4.32,23.24) v1(4.32,22.1) v1(4.45,27.64) v1(4.47,26.72) v1(4.47,18.34) v1(4.47,17.2) v1(4.83,20.83) v1(4.98,25.45) v1(4.95,24.13) v1(5.05,27.2) v1(5.11,19.23) v1(5.21,22.61) v1(5.36,17.7) v1(5.61,37.36) v1(5.64,34.82) v1(5.59,33.66) v1(5.64,31.57) v1(5.61,29.46) v1(5.64,28.7) v1(5.59,27.69) v1(5.59,26.67) v1(5.59,25.53) v1(5.59,24.51) v1(5.59,23.37) v1(5.59,20.83) v1(5.59,19.81) v1(5.59,18.8) v1(5.61,13.21) v1(5.61,11.35) v1(5.59,10.67) v1(5.59,9.91) v1(5.59,9.14) v1(5.59,8.38) v1(5.59,7.49) v1(5.59,6.6) v1(5.59,5.84) v1(5.59,4.95) v1(5.59,3.94) v1(5.59,3.17) v1(5.59,2.41) v1(5.59,1.52) v1(5.59,0.51) v1(5.71,44.32) v1(5.71,43.56) v1(5.71,41.66) v1(5.71,40.51) v1(5.71,39.37) v1(5.71,38.35) v1(5.71,36.45) v1(5.69,35.71) v1(5.66,16.66) v1(5.66,15.77) v1(5.84,42.67) v1(5.84,21.72) v1(5.92,34.24) v1(6.05,28.12) v1(6.1,26.04) v1(6.22,41.02) v1(6.22,33.55) v1(6.22,29.01) v1(6.22,19.3) v1(6.22,5.46) v1(6.22,2.16) v1(6.35,43.43) v1(6.35,42.16) v1(6.27,37.19) v1(6.35,30.35) v1(6.35,17.14) v1(6.35,4.45) v1(6.38,31.55) v1(6.48,20.45) v1(6.48,18.29) v1(6.48,15.24) v1(6.48,14.35) v1(6.48,11.38) v1(6.48,3.56) v1(6.48,0.51) v1(6.6,40.13) v1(6.58,39.17) v1(6.73,44.32) v1(6.73,24.64) v1(6.83,10.64) v1(6.88,37.47) v1(6.86,36.53) v1(6.86,34.39) v1(6.86,23.37) v1(6.86,22.1) v1(6.86,9.78) v1(6.99,41.66) v1(6.99,40.89) v1(7.01,35.56) v1(6.99,16.13) v1(6.99,13.21) v1(7.11,43.56) v1(7.11,42.67) v1(7.11,2.03) v1(7.24,27.81) v1(7.37,40.26) v1(7.44,33.5) v1(7.37,26.8) v1(7.37,6.6) v1(7.49,20.32) v1(7.49,15.24) v1(7.49,4.06) v1(7.49,0.64) v1(7.62,39.37) v1(7.62,24.51) v1(7.62,21.59) v1(7.62,19.3) v1(7.62,18.29) v1(7.62,17.27) v1(7.75,44.32) v1(7.75,42.04) v1(7.75,28.96) v1(7.75,25.22) v1(7.75,7.75) v1(7.75,3.17) v1(7.77,26.09) v1(7.87,29.97) v1(7.87,16.26) v1(8,43.43) v1(7.98,35.69) v1(8,34.95) v1(8,34.24) v1(8,31.57) v1(8,14.22) v1(8,6.1) v1(8,5.21) v1(8.05,33.55) v1(8.13,23.37) v1(8.13,20.83) v1(8.13,1.65) v1(8.15,13.23) v1(8.26,40.13) v1(8.38,42.67) v1(8.51,2.41) v1(8.64,44.45) v1(8.64,41.15) v1(8.64,39.37) v1(8.71,19.48) v1(8.71,16.66) v1(8.71,15.44) v1(8.79,31.55) v1(8.76,25.91) v1(8.76,24.38) v1(8.76,22.73) v1(8.81,21.72) v1(8.76,18.06) v1(8.76,13.84) v1(8.76,3.17) v1(8.76,0.76) v1(8.89,43.43) v1(8.89,41.91) v1(8.89,30.61) v1(8.89,27.81) v1(8.94,20.8) v1(8.89,7.37) v1(9.02,29.21) v1(9.12,26.8) v1(9.09,6.1) v1(9.07,5.36) v1(9.17,4.42) v1(9.27,42.67) v1(9.4,41.4) v1(9.4,39.88) v1(9.4,31.57) v1(9.4,30.89) v1(9.4,29.97) v1(9.37,28.57) v1(9.37,25.5) v1(9.4,24.61) v1(9.37,23.95) v1(9.37,23.32) v1(9.37,11.33) v1(9.37,10.72) v1(9.4,6.86) v1(9.53,10.16) v1(9.53,8) v1(9.65,44.32) v1(9.65,43.43) v1(9.65,40.77) v1(9.78,42.04) v1(9.83,9.58) v1(9.91,37.47) v1(9.86,36.09) v1(9.86,34.72) v1(9.91,20.95) v1(9.91,20.04) v1(9.91,19.05) v1(9.91,17.53) v1(9.91,15.37) v1(9.91,14.1) v1(9.91,13.21) v1(9.91,0.64) v1(10.16,36.7) v1(10.16,35.31) v1(10.16,8.64) v1(10.41,34.29) v1(10.36,11.3) v1(10.54,44.32) v1(10.54,40.77) v1(10.92,11.18) v1(10.92,0.64) v1(11.05,33.53) v1(11.18,35.69) v1(11.15,21.01) v1(11.18,19.81) v1(11.18,18.8) v1(11.18,17.53) v1(11.18,16.64) v1(11.18,15.24) v1(11.18,13.97) v1(11.18,13.21) v1(11.3,32.38) v1(11.28,31.37) v1(11.28,30.51) v1(11.25,29.59) v1(11.3,25.15) v1(11.43,27.94) v1(11.43,26.29) v1(11.35,23.93) v1(11.48,33.07) v1(11.63,10.77) v1(11.81,9.78) v1(12.19,0.64) v1(12.32,13.87) v1(12.5,24.46) v1(13,21.06) v1(13,19.13) v1(12.95,13.67) v1(13.08,17.37) v1(13.08,16) v1(13.08,14.73) v1(13.08,11.15) v1(13.28,25.17) v1(13.59,23.88) v1(13.94,25.91) v1(14.12,12.17) v1(14.1,11.05) v1(14.22,24.51) v1(14.33,15.04) v1(14.35,21.06) v1(14.35,15.65) v1(14.73,26.67) v1(14.88,16.79) v1(14.96,25.22) v1(14.99,12.93) v1(14.99,11.94) v1(15.42,16.13) v1(15.62,27.56) v1(15.62,25.91) v1(15.65,23.9) v1(15.72,44.4) v1(15.72,20.98) v1(16.18,16.89) v1(16.18,12.88) v1(16.36,6.58) v1(16.51,37.59) v1(16.69,17.4) v1(17.02,39.88) v1(17.02,23.9) v1(16.99,13.64) v1(17.17,17.86) v1(17.4,24.64) v1(17.6,20.9) v1(17.75,14.4) v1(18.06,44.4) v1(18.16,23.88) v1(18.16,0.76) v1(18.29,38.61) v1(18.29,18.85) v1(18.82,19.25) v1(18.85,15.24) v1(18.95,23.16) v1(18.9,20.7) v1(19.08,15.77) v1(19.56,39.88) v1(19.68,29.72) v1(19.68,15.62) v1(19.84,12.06) v1(20.04,16.66) v1(20.55,17.37) v1(20.62,44.4) v1(20.57,12.09) v1(20.7,1.78) v1(20.7,0.76) v1(20.83,30.99) v1(21.01,17.83) v1(22.1,39.88) v1(22.86,31.24) v1(23.11,0.76) v1(23.19,44.37) v1(23.62,20.19) v1(24.13,22.35) v1(24.89,23.11) v1(24.89,21.59) v1(25.02,33.78) v1(25.02,22.35) v1(25.15,33.15) v1(25.65,23.88) v1(25.65,23.11) v1(25.65,21.59) v1(25.65,20.83) v1(25.76,44.37) v1(25.78,0.76) v1(25.91,10.67) v1(26.29,30.35) v1(26.42,24.64) v1(26.42,23.88) v1(26.42,20.83) v1(26.42,20.07) v1(27.18,39.88) v1(27.18,25.4) v1(27.18,24.64) v1(27.18,19.56) v1(27.94,24.64) v1(27.94,23.88) v1(27.94,20.07) v1(28.27,44.37) v1(28.3,0.76) v1(28.45,20.57) v1(28.45,10.67) v1(28.45,8.13) v1(28.45,3.05) v1(28.7,23.88) v1(28.7,23.11) v1(29.21,21.34) v1(29.46,23.11) v1(29.46,22.1) v1(30.76,44.37) v1(30.81,0.84) v1(30.86,43.05) v1(30.99,10.67) v1(30.99,8.13) v1(31.5,21.97) v1(32.64,14.48) v1(33.32,44.37) v1(33.27,43.05) v1(33.38,0.69) v1(33.53,10.67) v1(33.53,3.05) v1(33.66,27.94) v1(34.8,17.53) v1(34.99,19.31) v1(35.81,43.05) v1(35.92,44.37) v1(35.89,0.71) v1(36.07,10.67) v1(36.07,8.13) v1(36.7,37.59) v1(36.77,12.64) v1(37.08,24.26) v1(37.21,19.18) v1(38.48,44.37) v1(38.48,43.05) v1(38.46,0.71) v1(38.61,10.67) v1(38.65,15.79) v1(38.65,14.99) v1(39.37,28.7) v1(40.64,28.7) v1(40.89,43.05) v1(40.97,44.37) v1(40.97,0.71) v1(41.05,17.39) v1(41.15,8.13) v1(41.91,28.7) v1(41.85,18.19) v1(41.99,31.57) v1(42.42,37.34) v1(42.65,23.79) v1(43.18,15.24) v1(43.54,44.37) v1(43.54,0.74) v1(43.69,38.61) v1(43.69,36.07) v1(43.69,10.67) v1(43.69,8.13) v1(44.25,25.39) v1(44.96,37.34) v1(45.85,24.59) v1(46.02,44.37) v1(46.23,42.42) v1(46.93,18.99) v1(46.93,16.45) v1(46.93,15.18) v1(46.99,11.94) v1(48.01,15.54) v1(48.01,13.97) v1(48.06,16.51) v1(48.77,41.15) v1(48.77,3.05) v1(49.15,33.15) v1(49.1,32.26) v1(49.2,33.91) v1(49.23,5.11) v1(49.33,41.99) v1(49.33,39.75) v1(49.33,3.71) v1(49.33,2.08) v1(49.28,0.66) v1(49.38,42.98) v1(49.35,38.89) v1(49.38,27.2) v1(49.4,25.78) v1(49.4,24.77) v1(49.4,23.5) v1(49.4,22.61) v1(49.4,21.44) v1(49.38,19.99)
ANT_TRN: length 47.7
  TOP w0.102: U1.142 22.94,24.22 22.94,24 23.25,23.69 v1(23.25,23.15) ; R23.1 13.28,3.3 15.62,3.3 16.13,2.79 17.53,2.79 v1(17.78,3.05) 18.03,3.05 18.54,2.54 25.77,2.54 JP3.18
  BOTTOM w0.102: v1(17.78,3.05) 17.91,3.17 17.91,4.32 17.53,4.7 17.53,13.72 16.38,14.86 16.38,15.75 15.32,16.81 15.32,17.93 14.99,18.26 14.99,21.29 16.03,22.33 16.81,22.33 17.73,23.24 17.73,24 18.24,24.51 19.94,24.51 20.27,24.18 22.68,24.18 23.25,23.61 v1(23.25,23.15)
ANT_TRNB: length 37.9
  TOP w0.102: R24.1 15.49,4.83 15.75,5.08 v1(18.03,5.08) 18.29,5.33 22.98,5.33 JP3.19 ; U1.69 22.69,24.11 22.69,23.67 v1(22.62,23.6)
  BOTTOM w0.102: v1(18.03,5.08) 18.03,5.84 17.78,6.1 17.78,13.79 16.61,14.96 16.61,15.85 15.57,16.89 15.57,18.11 15.21,18.47 15.21,21.18 16.13,22.1 16.97,22.1 18.82,23.95 22.27,23.95 v1(22.62,23.6)
DDR_REF: length 55.7
  TOP w0.102: U1.110 33.02,21.21 v1(32.38,21.21) ; U1.91 26.37,16.34 26.37,16.64 26.48,16.75 v1(26.48,16.87)
  TOP w0.254: 47.22,21.46 45.92,21.46 U2.J2 ; v1(48.77,24.13) 48.79,24.16 C59.2
  TOP w0.381: R5.2 48.87,15.42 C46.2 49.12,16.61 49.43,16.92 49.43,19.18 49.23,19.38 C47.1 48.84,20.42 R4.1 48.21,20.47 47.22,21.46 47.22,21.59 48.79,23.16 48.79,24.1 v1(48.77,24.13)
  POWER03 w0.254: v1(48.77,26.54) 48.77,26.84 48.55,27.05 45.47,27.05 44.83,27.69 39.12,27.69 38.71,27.28 38.71,26.77 37.85,25.91 36.2,25.91 35.41,25.12 34.8,25.12 33.3,23.62 32.26,23.62 30.48,21.84 30.48,21.18 27.46,18.16 27.05,18.16 26.67,17.78 26.67,17.14 26.48,16.96 v1(26.48,16.87)
  BOTTOM w0.178: v1(32.38,21.21) 32.38,20.45 30.73,18.8 29.12,18.8 28.78,19.13 28.4,19.13 27.43,18.16 27.05,18.16 26.48,17.59 v1(26.48,16.87)
  BOTTOM w0.381: v1(48.77,26.54) v1(48.77,24.13)
DDR_VDD: length 46.1
  TOP w0.102: U1.95 28.73,14.89 28.73,13.9 C54.2 ; v1(27.08,14.96) 27.03,14.91 26.76,14.91 26.6,15.08 26.6,15.16 U1.93
  TOP w0.152: U1.10 22.84,17.41 v1(22.71,17.41) ; U2.G9 40.26,18.99 41.05,18.99 U2.G7
  TOP w0.178: U1.29 32.01,18.33 32.31,18.33 32.7,17.93 33.06,17.93 C53.2
  TOP w0.254: C42.2 44.4,13.41 v1(44.45,13.46) ; v1(42.29,13.46) 42.24,13.41 C44.2 ; U2.G3 v1(44.25,18.99) ; U2.R1 46.18,25.87 46.18,27.15 45.92,27.41 C94.1 45.95,27.51 46.58,27.51 46.99,27.1 v1(46.99,25.2) ; C53.2 33.36,17.63 v1(33.36,17.17) ; R4.2 v1(48.79,21.87) ; 18.59,33.73 18.59,33.33 18.41,33.15 12.83,33.15 12.55,33.43 12.55,35.84 11.28,37.11 R15.1 ; C54.2 28.18,13.86 v1(28.07,13.97) ; v1(39.2,23.79) 39.6,23.39 U2.M9 ; v1(44.25,15.79) U2.C3
  TOP w0.305: C52.2 38.18,14.19 v1(39.45,14.19) ; U2.E9 v1(39.45,18.19) 39.4,18.19 38.68,17.48 C51.2 ; U2.E1 v1(46.65,17.39) ; U2.J9 v1(40.25,20.59) ; U2.C7 v1(41.05,15.79)
  TOP w0.381: U2.C1 v1(45.85,15.79) ; C47.2 v1(48.06,18.47) ; U2.A1 46.29,14.59 47.75,13.13 47.75,12.78 C56.2 v1(47.85,11.99) ; U2.G7 v1(41.05,19.79) ; C43.2 45.64,13.39 v1(45.72,13.46) ; U2.G1 v1(46.65,19.79) ; C49.2 v1(38.48,12.7) ; U2.C9 v1(39.45,15.79) ; U2.J1 v1(46.65,20.59) ; U2.A9 v1(39.45,14.19) ; C50.2 C51.2
  BOTTOM w0.254: C55.2 22.94,16.89 22.94,17.17 22.71,17.4 v1(22.71,17.41)
  vias: v1(20.19,35.56)
DINT: length 7.6
  TOP w0.102: JP1.13 18.66,8.38 17.14,8.38 16.89,8.64 13.11,8.64 12.78,8.31 R34.2
EXT_LDO_DIG: length 12.5
  TOP w0.102: U6.1 28.19,38.48 28.57,38.1 28.57,32.13 27.94,31.5 27.18,31.5 26.87,31.19 26.87,29.26 27.3,28.83 27.9,28.83 U1.54
GPO0: length 46.5
  TOP w0.102: JP3.17 25.26,5.59 v1(16.76,5.59) 16.51,5.33 12.78,5.33 ; R37.1 12.78,5.33 ; 12.78,5.33 R32.1 ; U1.139 v1(24.08,25.2)
  BOTTOM w0.102: v1(24.08,25.2) 23.29,25.2 22.73,24.64 20.57,24.64 20.17,25.04 17.22,25.04 16.61,24.43 16.61,23.65 14.66,21.69 14.33,21.69 13.94,21.31 13.94,16.64 14.78,15.8 14.78,14.86 16.66,12.98 16.66,7.54 17.02,7.19 17.02,5.84 v1(16.76,5.59)
HD: length 68.1
  TOP w0.102: JP2.4 43.55,11.43 17.5,11.43 17.25,11.18 14.86,11.18 12.57,8.89 v1(11.81,8.89)
  BOTTOM w0.102: R13.2 17.02,35.56 16.76,35.31 15.11,35.31 12.83,33.02 12.83,31.37 13.34,30.86 U3.7 13.34,28.7 13.84,28.19 13.84,27.05 9.4,22.61 9.4,12.57 9.91,12.06 9.91,10.79 v1(11.81,8.89)
I2C_SCLK: length 62
  TOP w0.102: U1.111 34.4,20.54 34.6,20.54 36.29,22.23 36.6,22.23 38.15,23.77 38.15,25.45 38.73,26.04 38.73,27.43 v1(38.23,27.94)
  BOTTOM w0.102: v1(38.23,27.94) 38.48,27.69 45.83,27.69 47.75,25.76 47.75,20.24 48.77,19.22 48.77,6.43 48.18,5.84 30.2,5.84 29.55,5.19 JP3.15
I2C_SD: length 63.3
  TOP w0.102: U1.36 34.51,21.23 34.82,21.23 36.13,22.54 36.58,22.54 37.92,23.88 37.92,25.6 38.48,26.16 38.48,26.92 v1(38.23,27.18)
  BOTTOM w0.102: JP3.16 27.94,2.91 27.94,3.3 28.61,3.97 28.61,4.99 29.71,6.1 48.07,6.1 48.51,6.54 48.51,19.11 47.5,20.13 47.5,25.65 45.72,27.43 38.48,27.43 v1(38.23,27.18)
JDO: length 25.1
  TOP w0.102: v1(14.3,10.01) 14.48,9.83 14.86,9.83 14.99,9.7 15.52,9.7 15.7,9.53 15.7,9.27 R11.2 17.02,9.14 17.53,8.63 28.57,8.63 JP1.5 ; R19.2 v1(13.46,2.79)
  BOTTOM w0.102: v1(13.46,2.79) 12.93,3.33 12.93,8.64 v1(14.3,10.01)
LINK0: length 33.3
  TOP w0.102: R19.1 15.75,2.79 16,2.54 17.78,2.54 v1(18.03,2.29) 20.94,2.29 JP3.22 ; v1(22.96,21.64) 23.22,21.39 23.22,19.55 U1.82
  BOTTOM w0.102: v1(22.96,21.64) 22.56,22.05 21.74,22.05 21.26,21.56 21.26,20.52 21.13,20.4 21.13,19.43 18.21,16.51 18.21,7.42 18.03,7.24 18.03,6.22 18.54,5.71 18.54,4.7 18.29,4.45 18.29,2.54 v1(18.03,2.29)
LINK1: length 38.7
  TOP w0.102: v1(22.23,12.06) 22.12,12.06 21.97,12.22 21.97,12.62 21.82,12.78 21.82,17.8 U1.8 ; R9.2 13.28,4.32 15.37,4.32 15.88,4.83 17.53,4.83 18.51,3.84 JP3.23
  POWER03 w0.102: JP3.23 20.35,3.84 22.23,5.71 23.75,5.71 24.38,6.35 30.86,6.35 32.09,7.58 JP1.3
  BOTTOM w0.102: JP3.23 20.23,3.84 20.74,4.36 20.74,10.61 22.2,12.06 v1(22.23,12.06)
LINK2: length 33.5
  TOP w0.102: JP3.24 18.26,1.3 17.27,2.29 13.28,2.29 R12.2 ; v1(22.33,12.83) 22.2,12.83 22.05,12.98 22.05,17.67 U1.83
  BOTTOM w0.102: JP1.7 27.01,7.58 25.91,6.48 23.5,6.48 ; 23.5,6.48 23.24,6.22 23.24,2.92 22.73,2.41 20.5,2.41 JP3.24 ; 23.5,6.48 23.24,6.73 23.24,11.3 23.44,11.51 23.44,12.45 23.06,12.83 v1(22.33,12.83)
LINK3: length 28.2
  TOP w0.102: v1(21.56,12.47) 21.59,12.5 21.59,18.21 22.15,18.77 22.15,18.84 U1.7 ; R18.2 15.09,3.84 JP3.25 17.75,3.84 18.8,2.79 20.19,2.79 20.57,3.17 20.57,4.57 v1(20.32,4.83)
  POWER03 w0.102: JP1.9 23.04,6.22 21.72,6.22 v1(20.32,4.83)
  BOTTOM w0.102: v1(20.32,4.83) 20.51,5.02 20.51,10.7 21.74,11.93 21.74,12.27 21.56,12.45 v1(21.56,12.47)
LINK4: length 45.5
  TOP w0.102: JP3.26 16.37,1.78 R7.2 ; v1(22.86,12.06) 22.86,13.34 22.28,13.92 22.28,17.55 U1.9
  POWER03 w0.102: JP1.1 34.58,7.65 33.4,6.48 31.75,6.48 31.11,5.84 24.51,5.84 23.24,4.57 23.24,3.43 22.35,2.54 19.18,2.54 17.94,1.3 JP3.26
  BOTTOM w0.102: v1(22.86,12.06) 22.86,11.3 23,11.16 23,3.19 22.61,2.79 19.43,2.79 17.94,1.3 JP3.26
MA00: length 27.1
  TOP w0.102: 28.63,15.34 27.9,16.08 27.9,16.32 27.56,16.66 27.56,16.91 27.97,17.32 27.97,17.46 27.48,17.95 27.48,18.09 27.65,18.25 27.79,18.25 28.11,17.94 28.25,17.94 28.36,18.04 28.36,18.19 28.04,18.51 28.04,18.65 28.21,18.82 28.48,18.82 v1(28.64,18.66) ; v1(40.25,23.79) 40.55,23.79 40.65,23.69 U2.M8
  POWER03 w0.102: v1(40.25,23.79) 40.15,23.79 36.35,19.99 34.26,19.99 34.16,19.89 34.16,19.48 34.07,19.38 33.93,19.38 33.83,19.48 33.83,19.89 33.73,19.99 33.56,19.99 32.16,18.59 31.73,18.59 31.63,18.49 31.63,17.75 31.53,17.65 31.37,17.65 31.27,17.75 31.27,18.49 31.17,18.59 31.02,18.59 30.92,18.49 30.92,18.03 30.82,17.93 30.66,17.93 30.56,18.03 30.56,18.49 30.46,18.59 30.31,18.59 30.21,18.49 30.21,18.03 30.1,17.93 29.95,17.93 29.85,18.03 29.85,18.49 29.75,18.59 29.6,18.59 29.49,18.49 29.49,18.03 29.39,17.93 29.24,17.93 29.14,18.03 29.14,18.82 29.04,18.92 28.74,18.92 28.64,18.82 v1(28.64,18.66)
MA01: length 26.9
  TOP w0.102: U2.M3 44.65,23.09 44.53,22.96 44.22,22.96 44.09,23.09 44.09,23.67 44.22,23.79 v1(45.05,23.79) ; U1.107 32.97,19.13 32.97,18.93 33.49,18.41 v1(33.91,18.41)
  BOTTOM w0.102: v1(33.91,18.41) 34.39,18.9 35.15,18.9 35.81,19.56 35.81,20.19 38.22,22.6 45.36,22.6 45.47,22.5 45.47,22.12 45.57,22.02 46.74,22.02 46.84,22.12 46.84,22.3 46.74,22.4 45.85,22.4 45.77,22.48 45.77,22.78 45.87,22.89 46.1,22.89 46.2,22.99 46.2,23.29 46.1,23.39 43.97,23.39 43.87,23.5 43.87,23.8 43.97,23.9 44.95,23.9 45.05,23.8 v1(45.05,23.79)
MA02: length 27.5
  TOP w0.102: v1(28.07,16.75) 28.08,16.75 28.08,16.76 28.14,16.69 28.14,16.18 U1.96 ; U2.M7 41.73,23.39 41.83,23.29 41.83,23.06 41.94,22.96 43.71,22.96 43.81,23.06 43.81,23.27 43.72,23.37 42.32,23.37 42.21,23.47 42.21,23.69 42.11,23.79 v1(41.05,23.79)
  POWER03 w0.102: v1(28.07,16.75) 27.71,16.75 27.61,16.85 27.61,17.81 27.71,17.91 28.83,17.91 29.06,17.68 30.66,17.68 30.75,17.59 30.75,17.17 30.85,17.07 31,17.07 31.1,17.17 31.1,17.3 31.2,17.4 31.34,17.4 31.45,17.3 31.45,17.2 31.55,17.09 31.95,17.09 33.76,18.9 33.99,18.9 34.8,19.71 35.38,19.71 35.49,19.61 35.49,19.25 35.59,19.15 35.74,19.15 35.84,19.25 35.84,19.61 35.94,19.71 36.4,19.71 40.07,23.39 41.4,23.39 41.5,23.49 41.5,23.69 41.4,23.79 v1(41.05,23.79)
MA03: length 27.1
  TOP w0.102: U2.N2 45.45,24.49 45.35,24.59 v1(45.05,24.59) ; v1(30.52,20.55) 30.29,20.32 30.29,20.18 30.49,19.98 30.63,19.98 31.13,20.48 31.27,20.48 U1.31
  POWER03 w0.102: v1(30.52,20.55) 30.75,20.32 31.01,20.32 31.3,20.61 31.3,20.81 31.54,21.05 31.69,21.05 31.9,21.27 31.9,21.41 33.58,23.09 33.76,23.09 33.96,23.29 33.96,23.47 34.15,23.66 34.33,23.66 34.53,23.86 34.53,24.04 35,24.51 36.45,24.51 36.96,25.02 37.82,25.02 39.24,26.44 39.24,26.87 39.36,26.99 39.67,26.99 39.78,27.1 40.03,27.1 40.14,26.99 40.39,26.99 40.49,27.1 40.74,27.1 40.85,26.99 41.1,26.99 41.21,27.1 41.45,27.1 41.56,26.99 41.81,26.99 41.92,27.1 42.16,27.1 42.27,26.99 42.52,26.99 42.63,27.1 44.6,27.1 45.31,26.39 45.31,26.24 45.26,26.19 45.01,26.19 44.91,26.09 44.91,25.91 45.01,25.81 45.36,25.81 45.45,25.72 45.45,24.31 45.35,24.21 45.01,24.21 44.91,24.31 44.91,24.49 45.01,24.59 v1(45.05,24.59)
MA04: length 26.9
  TOP w0.102: v1(41.05,24.59) 41.05,24.3 40.95,24.19 U2.N8 ; v1(29.21,14.48) 29.34,14.61 29.34,15.34 U1.21
  BOTTOM w0.102: v1(41.05,24.59) 41.07,24.59 41.17,24.7 41.17,26.72 41.07,26.82 40.84,26.82 40.74,26.72 40.74,26.37 40.64,26.26 40.36,26.26 40.26,26.37 40.26,26.72 40.16,26.82 39.85,26.82 39.74,26.71 39.74,26.29 33.89,20.44 32.89,20.44 30.71,18.27 28.16,18.27 27.69,17.79 27.69,17.47 27.39,17.17 27.39,16.52 29.21,14.7 v1(29.21,14.48)
MA05: length 27.1
  TOP w0.102: U2.N3 43.15,24.19 43.05,24.3 43.05,24.92 42.95,25.02 42.52,25.02 42.42,25.12 42.42,25.35 42.52,25.45 43.08,25.45 43.18,25.55 43.18,25.7 43.08,25.81 41.94,25.81 41.83,25.91 41.83,26.47 41.94,26.57 42.22,26.57 42.32,26.47 42.32,26.24 42.42,26.14 42.57,26.14 42.68,26.24 42.68,26.47 42.78,26.57 43.35,26.57 43.45,26.47 v1(43.45,26.19) ; U1.106 31.48,19.92 v1(31.15,19.92)
  POWER03 w0.102: v1(43.45,26.19) 44.17,26.19 44.27,26.3 44.27,26.49 44.17,26.59 43.08,26.59 42.92,26.44 39.94,26.44 37.12,23.62 35.01,23.62 34.65,23.26 34.65,22.79 34.14,22.28 34.14,21.97 32.09,19.92 v1(31.15,19.92)
MA06: length 27.1
  TOP w0.102: U2.N7 v1(41.85,24.59) ; 28.7,16.33 28.52,16.51 28.52,16.92 28.22,17.23 28.22,17.57 28.56,17.92 28.71,17.92 29.27,18.47 v1(29.27,19.29)
  POWER03 w0.102: v1(29.27,19.29) 29.71,18.85 32.05,18.85 33.48,20.27 34.05,20.27 34.16,20.37 34.16,20.8 34.26,20.9 34.41,20.9 34.51,20.8 34.51,20.37 34.61,20.27 34.77,20.27 34.87,20.37 34.87,20.8 34.97,20.9 35.12,20.9 35.22,20.8 35.22,20.37 35.32,20.27 35.48,20.27 35.58,20.37 35.58,20.8 35.68,20.9 35.83,20.9 35.93,20.8 35.93,20.37 36.04,20.27 36.27,20.27 36.53,20.52 36.53,20.67 36.28,20.92 36.28,21.06 36.38,21.17 36.53,21.17 36.78,20.92 36.92,20.92 37.03,21.03 37.03,21.17 36.78,21.42 36.78,21.56 36.89,21.67 37.03,21.67 37.28,21.42 37.42,21.42 37.53,21.53 37.53,21.67 37.28,21.92 37.28,22.07 37.39,22.17 37.53,22.17 37.78,21.92 37.93,21.92 38.03,22.03 38.03,22.18 37.78,22.43 37.78,22.57 37.89,22.68 38.04,22.68 38.29,22.43 38.43,22.43 38.54,22.54 38.54,22.68 38.29,22.93 38.29,23.07 38.39,23.18 38.54,23.18 38.79,22.93 38.93,22.93 39.75,23.75 39.75,23.88 40.07,24.2 41.75,24.2 41.85,24.3 v1(41.85,24.59)
MA07: length 27
  TOP w0.102: v1(32.75,18.51) 32.54,18.51 U1.30 ; U2.P2 45.45,25.27 45.33,25.39 v1(45.05,25.39)
  BOTTOM w0.102: v1(32.75,18.51) 32.77,18.53 32.77,19.18 33.15,19.56 34.29,19.56 38.92,24.19 41.2,24.19 41.45,24.43 41.45,26.39 41.55,26.49 41.76,26.49 41.86,26.39 41.86,25.1 41.96,24.99 42.14,24.99 42.24,25.1 42.24,26.52 42.34,26.62 42.49,26.62 42.6,26.52 42.6,25.1 42.7,25 42.85,25 42.95,25.1 42.95,26.52 43.05,26.62 44.55,26.62 44.65,26.52 44.65,25.1 44.75,25 45.34,25 45.44,25.1 45.44,25.29 45.34,25.39 v1(45.05,25.39)
MA08: length 27.2
  TOP w0.102: U1.22 29.58,15.81 29.58,15.63 v1(29.84,15.37) ; U2.P8 40.34,24.99 40.23,24.89 40.23,24.29 40.13,24.19 38.76,24.19 38.66,24.29 38.66,24.87 38.76,24.97 38.91,24.97 39.01,24.87 39.01,24.7 39.12,24.59 v1(39.45,24.59)
  BOTTOM w0.102: v1(29.84,15.37) 30.28,15.37 30.38,15.47 30.38,15.75 30.28,15.85 29.95,15.85 29.84,15.95 29.84,17.04 29.74,17.14 29.59,17.14 29.49,17.04 29.49,15.59 29.39,15.49 29.26,15.49 29.16,15.59 29.16,16.83 29.06,16.93 28.54,16.93 28.19,17.27 28.19,17.65 28.35,17.81 30.97,17.81 33.09,19.94 34.1,19.94 38.92,24.77 39.28,24.77 v1(39.45,24.59)
MA09: length 27.3
  TOP w0.102: v1(30.52,19.29) 30.69,19.29 U1.104 ; v1(44.25,24.59) 43.97,24.59 43.87,24.7 43.87,24.89 43.97,24.99 U2.P3
  POWER03 w0.102: v1(44.25,24.59) 44.25,24.3 44.15,24.2 43.29,24.2 43.06,24.43 43.06,25.57 42.72,25.91 40.13,25.91 38.3,24.08 38.3,23.42 36.7,21.82 36.35,21.82 36.25,21.92 36.25,23.01 36.14,23.11 35.99,23.11 35.89,23.01 35.89,21.31 35.79,21.21 35.64,21.21 35.53,21.31 35.53,23.01 35.43,23.11 35.28,23.11 35.18,23.01 35.18,21.32 35.08,21.22 34.05,21.22 31.93,19.1 30.71,19.1 v1(30.52,19.29)
MA10: length 27.4
  TOP w0.102: v1(45.85,23.79) 46.13,23.79 46.23,23.69 46.23,23.37 46.13,23.27 45.55,23.27 45.45,23.37 U2.M2 ; v1(33.37,19.13) 33.28,19.22 33.23,19.22 U1.32
  BOTTOM w0.102: 46.1,23.79 46.1,23.79 46.26,23.95 46.26,23.96 ; 46.1,23.79 v1(45.85,23.79) ; 46.1,23.79 46.26,23.96 ; 46.26,23.96 46.61,24.3 46.61,24.44 46.51,24.53 46.38,24.53 46.37,24.53 46.04,24.2 43.15,24.2 43.05,24.1 43.05,23.27 43.15,23.16 44.54,23.16 44.63,23.08 44.63,22.95 44.54,22.86 42.34,22.86 42.24,22.96 42.24,24.08 42.14,24.18 42.01,24.18 41.91,24.08 41.91,22.96 41.81,22.86 41.61,22.86 41.5,22.96 41.5,23.29 41.4,23.39 39.86,23.39 39.76,23.29 39.76,22.94 39.66,22.83 39.5,22.83 39.4,22.94 39.4,23.29 39.3,23.39 39.14,23.39 39.04,23.29 39.04,22.96 38.94,22.86 38.79,22.86 38.68,22.96 38.68,23.16 38.61,23.24 38.35,23.24 34.42,19.3 33.54,19.3 v1(33.37,19.13)
MA11: length 28.2
  TOP w0.102: v1(40.25,25.39) 42.09,25.39 42.19,25.29 42.19,25.1 42.09,24.99 U2.P7 ; U1.98 29.88,15.86 29.91,15.86 30.25,15.52 30.25,14.76 v1(29.97,14.48)
  BOTTOM w0.102: v1(29.97,14.48) 29.54,14.91 29.35,14.91 27.62,16.65 27.62,17.07 27.94,17.4 27.94,17.72 28.26,18.04 30.84,18.04 32.99,20.19 33.99,20.19 39.83,26.04 40.67,26.04 40.77,25.93 40.77,25.17 40.67,25.07 40.35,25.07 40.25,25.17 v1(40.25,25.39)
MA12: length 26.9
  TOP w0.102: v1(43.45,24.59) 43.45,25.6 44.05,26.19 45.36,26.19 45.45,26.1 U2.R2 ; U1.105 31.21,19.48 30.94,19.48 30.69,19.74 30.35,19.74 30,19.39 29.85,19.39 29.53,19.71 29.53,19.85 29.67,20 29.82,20 v1(29.89,19.92)
  POWER03 w0.102: v1(29.89,19.92) 30.5,19.92 30.99,19.43 31.93,19.43 33.99,21.49 34.85,21.49 34.95,21.59 34.95,23.16 35.15,23.37 36.47,23.37 36.58,23.27 36.58,22.96 36.68,22.86 36.83,22.86 36.93,22.96 36.93,23.27 37.03,23.37 37.24,23.37 40.06,26.19 42.82,26.19 43.27,25.74 43.71,25.74 43.81,25.64 43.81,24.69 43.71,24.59 43.46,24.59 v1(43.45,24.59)
MBA0: length 26.9
  TOP w0.102: U1.33 32.49,20.68 32.28,20.68 32,20.95 31.37,20.95 v1(31.11,21.21) ; U2.L2 45.45,22.89 45.55,22.99 v1(46.65,22.99)
  POWER03 w0.102: v1(46.65,22.99) 46.65,22.58 46.55,22.48 46.35,22.48 46.25,22.58 46.25,25.81 44.7,27.36 39.29,27.36 39.01,27.08 39.01,26.57 37.76,25.31 36.92,25.31 36.35,24.74 34.9,24.74 31.37,21.21 v1(31.11,21.21)
MBA1: length 26.9
  TOP w0.102: U1.108 32.36,20.45 31.88,20.45 v1(31.78,20.55) ; U2.L3 v1(45.05,22.99)
  POWER03 w0.102: v1(45.05,22.99) 43.76,22.99 43.66,23.09 43.66,23.24 43.87,23.44 43.87,23.77 43.97,23.88 44.15,23.88 44.25,23.77 44.25,23.42 44.35,23.32 44.56,23.32 44.66,23.42 44.66,26.51 44.32,26.85 42.93,26.85 42.75,26.67 39.83,26.67 37.88,24.73 37,24.73 36.63,24.36 36.63,23.95 36.53,23.85 36.3,23.85 36.2,23.95 36.2,24.18 36.09,24.28 35.94,24.28 35.84,24.18 35.84,23.95 35.74,23.85 35.53,23.85 35.43,23.95 35.43,24.18 35.33,24.28 35.13,24.28 34.98,24.13 34.98,23.95 34.19,23.17 34.19,23.02 34.28,22.94 34.28,22.8 34.17,22.69 34.03,22.69 33.94,22.77 33.59,22.77 33.38,22.56 33.38,22.38 33.48,22.28 33.76,22.28 33.86,22.17 33.86,22.02 33.76,21.92 33.48,21.92 33.38,21.82 33.38,21.56 32.36,20.55 v1(31.78,20.55)
MCASN: length 27.2
  TOP w0.102: U2.L7 41.71,22.59 41.81,22.49 41.81,22.3 41.71,22.2 41.15,22.2 41.05,22.3 v1(41.05,22.99) ; v1(27.2,17.59) 27.2,17.41 27.31,17.3 27.31,16.6 27.6,16.31 27.6,15.98 27.54,15.92 27.54,15.73 U1.19
  POWER03 w0.102: v1(27.2,17.59) 27.2,16.76 26.9,16.46 26.42,16.46 26.31,16.36 26.31,15.47 26.42,15.37 29.16,15.37 29.67,15.88 29.67,16 29.77,16.1 29.97,16.1 30.07,16 30.07,15.82 30.18,15.72 30.35,15.72 30.45,15.82 30.45,16.5 30.56,16.6 32.2,16.6 33.25,17.65 34.16,17.65 34.52,18.01 36.04,18.01 36.7,18.67 36.7,19.3 39.88,22.48 40.54,22.48 v1(41.05,22.99)
MCKE: length 27.6
  TOP w0.102: U2.K2 46.18,21.79 47.12,22.73 47.12,23.33 v1(46.65,23.79) ; v1(35.69,18.41) 35.2,18.9 34.69,18.9 34.15,19.44 34.15,19.73 U1.34
  BOTTOM w0.102: v1(46.65,23.79) 46.99,23.79 47.09,23.69 47.09,21.89 46.99,21.79 45.29,21.79 45.19,21.69 45.19,21.16 45.09,21.06 44.93,21.06 44.83,21.16 44.83,21.62 44.73,21.72 44.5,21.72 44.4,21.62 44.4,20.83 44.3,20.73 44.15,20.73 44.04,20.83 44.04,21.62 43.94,21.72 43.79,21.72 43.69,21.62 43.69,20.83 43.59,20.73 43.43,20.73 43.35,20.82 43.35,21.83 43.08,22.1 38.48,22.1 37.44,21.06 37.44,20.29 36.73,19.58 36.73,18.62 36.45,18.34 35.76,18.34 v1(35.69,18.41)
MCLK_N: length 19.6
  TOP w0.102: R30.1 32.31,13.04 33.81,13.04 33.91,13.15 33.91,13.97 34.29,14.35 34.87,14.35 C96.2 35.48,14.35 35.9,14.35 36.07,14.18 36.07,13.84 36.2,13.72 36.45,13.72 36.58,13.84 36.58,21.51 36.78,21.72 37.34,21.72 37.8,22.17 R3.2 37.9,22.17 38.23,21.84 38.23,21.7 38.33,21.6 39.37,21.6 39.5,21.72 39.5,22.07 39.62,22.19 40.25,22.19 U2.K8
MCLK_P: length 18.8
  TOP w0.102: U2.J8 40.47,20.99 40.07,21.39 38,21.39 37.87,21.26 R3.1 37.8,21.26 37.54,21.52 36.87,21.52 36.78,21.43 36.78,13.76 36.53,13.51 36.11,13.51 35.86,13.76 35.86,14.1 35.81,14.15 35.53,14.15 C95.2 34.82,14.15 34.37,14.15 34.11,13.89 34.11,13.06 33.89,12.84 32.31,12.84 R31.1
MCSN: length 27.1
  TOP w0.102: v1(27.2,16.15) 27.2,15.71 U1.94 ; v1(40.25,22.99) 39.85,22.99 39.75,22.89 39.75,22.69 39.85,22.59 U2.L8
  POWER03 w0.102: v1(27.2,16.15) 26.67,16.15 26.57,16.05 26.57,15.7 26.67,15.6 27.53,15.6 27.64,15.7 27.64,16.28 27.74,16.38 27.89,16.38 27.99,16.28 27.99,15.7 28.09,15.6 28.42,15.6 28.52,15.7 28.52,16.64 28.63,16.74 28.78,16.74 28.88,16.64 28.88,15.93 28.98,15.82 29.18,15.82 29.29,15.93 29.29,17.3 29.39,17.4 29.57,17.4 29.67,17.3 29.67,16.46 29.77,16.36 29.97,16.36 30.07,16.46 30.07,17.3 30.18,17.4 30.4,17.4 30.51,17.3 30.51,16.93 30.61,16.83 32.05,16.83 33.11,17.88 33.96,17.88 34.37,18.29 34.37,18.62 34.62,18.87 35.89,18.87 39.75,22.73 39.99,22.73 v1(40.25,22.99)
MDQ00: length 18.8
  TOP w0.102: U1.24 30.38,16.42 30.38,16.05 30.73,15.7 30.73,15.49 v1(30.86,15.37) ; U2.G8 40.65,19.69 40.55,19.79 v1(40.25,19.79)
  BOTTOM w0.102: v1(40.25,19.79) 40.25,19.5 40.06,19.3 39.85,19.3 39.75,19.41 39.75,20.35 39.65,20.45 39.47,20.45 39.37,20.35 39.37,19.38 36.53,16.54 35.93,16.54 35.75,16.36 35.58,16.36 35.4,16.54 35.22,16.54 35.04,16.36 34.86,16.36 34.69,16.54 34.51,16.54 34.33,16.36 34.15,16.36 33.98,16.54 32.08,16.54 31.98,16.43 31.98,16.03 31.88,15.93 31.24,15.93 31.14,15.82 31.14,15.67 31.24,15.57 31.88,15.57 31.98,15.47 31.98,15.24 31.88,15.14 30.96,15.14 30.86,15.24 v1(30.86,15.37)
